# Altium PCB PCB1.PcbDoc
Units mm, origin at the board's own origin, x right, y up, seen from the top; angles counter-clockwise.
Board outline 85.7 x 54 mm, 2 copper layers (Top Layer, Bottom Layer); 67 components, 71 nets, 298 pads, 36 vias.
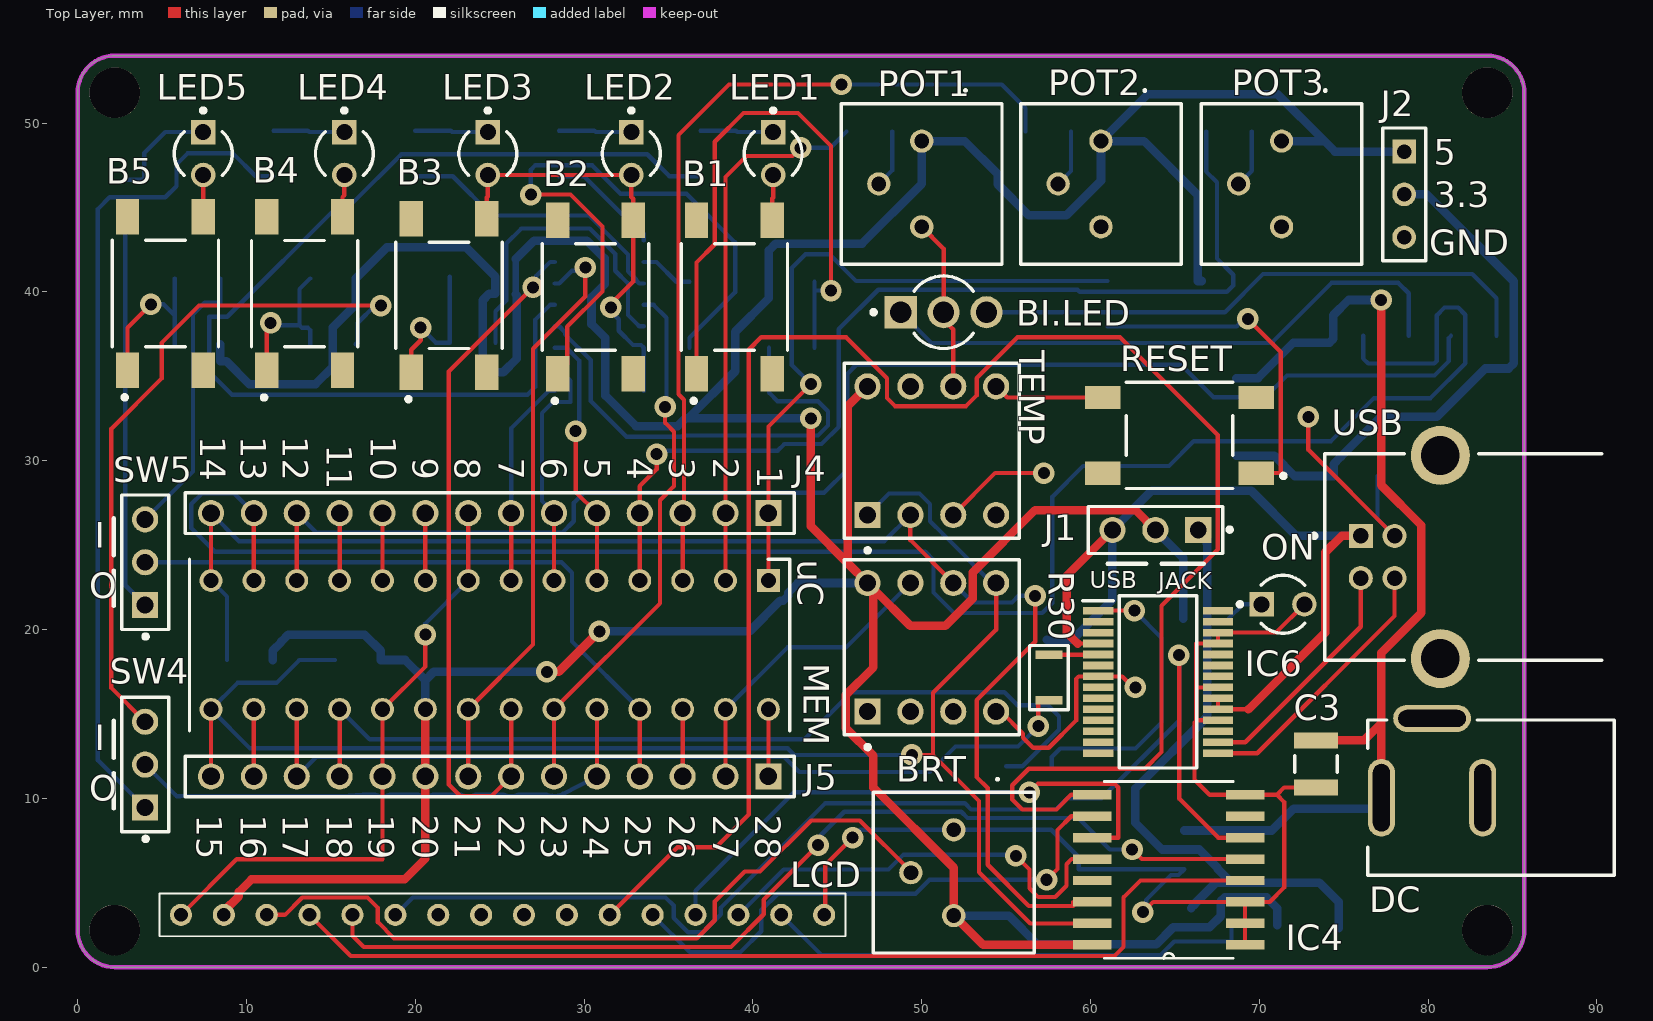
[diagram p0: Top Layer view]
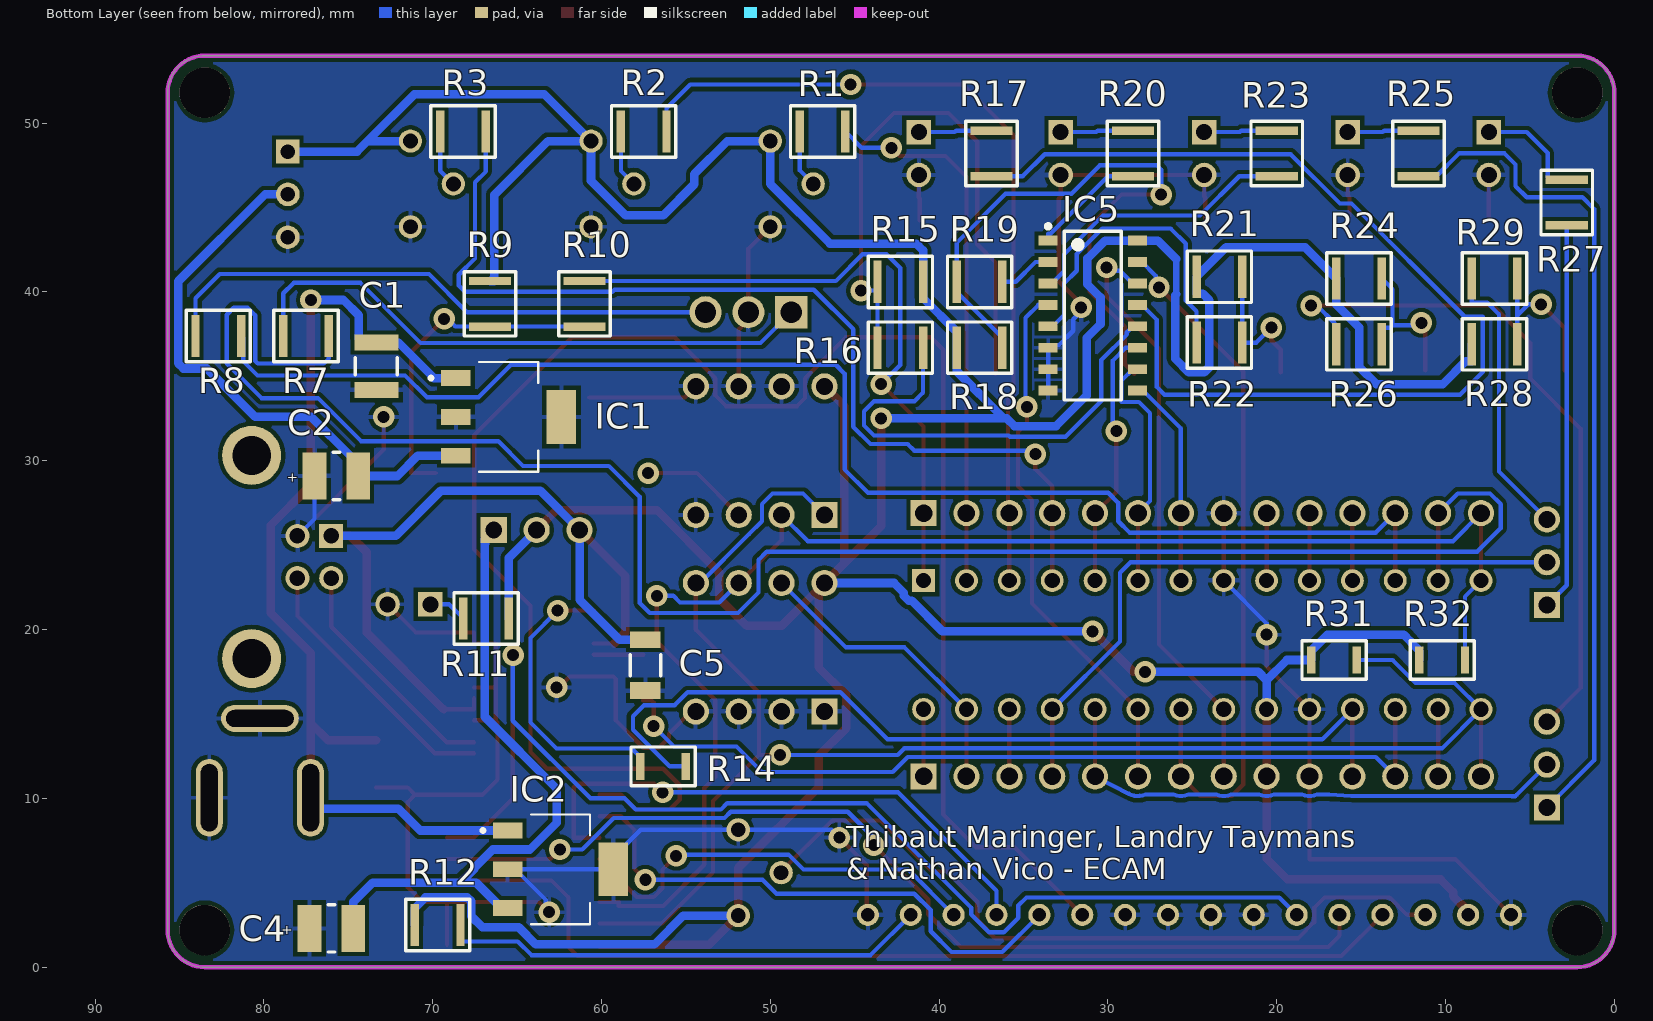
[diagram p1: Bottom Layer view, seen from below]
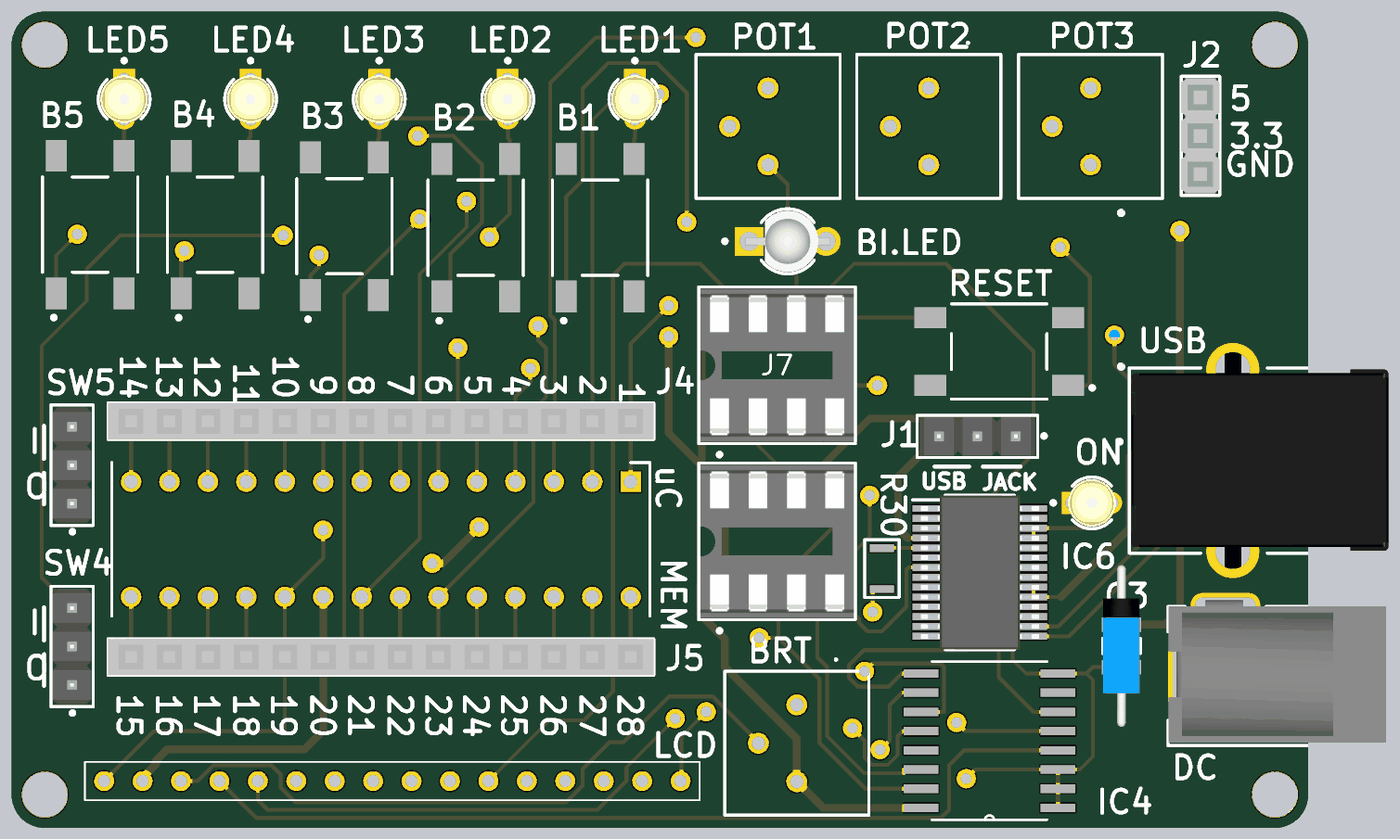
[diagram p2: 3D render of the assembled board from above, using the file's embedded part models]

## Layer stack, top to bottom
Top Solder: solder mask 0.0102, Solder Resist, Dk 3.5
Top Layer: signal copper 0.0356
Dielectric 1: dielectric 0.32, FR-4, Dk 4.8
Bottom Layer: signal copper 0.0356
Bottom Solder: solder mask 0.0102, Solder Resist, Dk 3.5

## Board outline
0,2.2 0,51.8 cw(c2.2,51.8) 2.2,54 83.5,54 cw(c83.5,51.8) 85.7,51.8 85.7,51.807 85.7,2.2 cw(c83.5,2.2) 83.5,0 2.2,0 cw(c2.2,2.2)

## Design rules (kind name [scope] priority, off if disabled: settings)
Clearance [All] p1: gap=0.254 ignorepadtopadclearanceinfootprint=FALSE except(0: Arc-Hole Track-Hole SMDPad-Hole THPad-Hole Via-Hole Fill-Hole Poly-Hole Region-Hole Text-Hole; 0.127: SMDPad-SMDPad)
HoleSize [All] p1: absolutevalues=TRUE maxlimit=5.08 minlimit=0.025 maxpercent=80.000 minpercent=20.000
PolygonConnect [All] p1: connectstyle=Relief reliefconductorwidth=0.254 reliefentries=4 polygonreliefangle="90 Angle" airgapwidth=0.254
RoutingVias [All] p1: holewidth=0.711 width=1.27 viastyle="Through Hole" minholewidth=0.711 minwidth=1.27 maxholewidth=0.711 maxwidth=1.27
SilkToSilkClearance [All] p1: silktosilkclearance=0.025
SilkToSolderMaskClearance [IsPad] p1: minsilkscreentomaskgap=0.025 clearancetoexposedcopper=TRUE
SolderMaskExpansion [All] p1: expansion=0.102 istentingtop=FALSE
Width [All] p1: maxlimit=0.508 minlimit=0.254 preferedwidth=0.254 minimp=50.000000 maximp=50.000000 favimp=50.000000
27 further rules are at their usual default settings.

## Classes and differential pairs
component class UART: C5 IC6 R14 R30 USB
component class Switch: B1 B2 B3 B5 IC5 LED3 LED4 LED5 R15 R16 R17 R18 R19 R20 R21 R22 R23 R24 R25 R26 R27 R28 R29 SW4
component class LCD-MEM-TEMP: IC4 MEM R12 TEMP
component class PIC: J4 J5 ON R9 R10 R11 R31 R32 RESET uC
component class Power: BI.LED C1 C2 C3 C4 DC IC1 IC2 J1 J2 POT1 POT2 POT3 R1 R2 R3 R7 R8

## Components (designator, comment, footprint, x,y, rotation, side; value= is the part's Value field where it differs from the comment)
B1 "SW-PB" BUTTON 38.9,39.7 r90 top (schematic designator S2)
B2 "SW-PB" BUTTON 30.675,39.7 r90 top (schematic designator S3)
B3 "SW-PB" BUTTON 22,39.8 r90 top (schematic designator S4)
B4 "SW-PB" BUTTON 13.449,39.9 r90 top (schematic designator S5)
B5 "SW-PB" BUTTON 5.195,39.907 r90 top (schematic designator S6)
BI.LED "LTL1BEKVJNN" "Bicolor LED" 51.3,38.8 r180 top (schematic designator D1)
BRT "RPot" POT 51.9,5.6 r90 top value=10K (schematic designator R13)
C1 "Cap" "Cap 100nF" 73.339,35.6 r270 bottom value=100nF
C2 "Cap Pol2" "CAP+ 22UF" 75.7,29.1 r0 bottom value=22uF
C3 "Cap" "Cap 100nF" 73.358,12.041 r270 top value=100nF
C4 "Cap Pol2" "CAP+ 22UF" 76,2.3 r0 bottom value=22uF
C5 "Cap" "cap 4.7uf" 57.4,17.9 r90 bottom value=4.7uF
DC "PJ-002A" "DC Jack" 83.732,10.041 r90 top (schematic designator J3)
IC1 "MIC5209-3.3YS-TR" LDO 65.5,32.6 r180 bottom
IC2 "MIC5209-5.0YS" LDO 62.425,5.8 r180 bottom
IC4 "PCF8574AT_3,512" "I2C LCD IC" 64.635,5.771 r180 top
IC5 "MC14053BDG" "Triple SPDT switch" 30.9,38.6 r180 bottom
IC6 "FT232RL-TUBE" SOP65P780X200-28N 64,16.9 r0 top
J1 "M20-9990346" "header 3 pins male" 63.84,25.9 r180 top
J2 "M20-9990346" "Header 3 pins fem." 78.579,48.318 r270 top
J4 "SSW-114-01-G-S" "Header 14 pins fem." 40.92,26.9 r180 top
J5 "SSW-114-01-G-S" "Header 14 pins fem." 40.92,11.3 r180 top
LCD "M20-7821642" "Header 16 pins fem." 44.22,3.1 r0 top (schematic designator J6)
LED1 "LED1" "LED 3mm" 41.2,48.2 r270 top (schematic designator D3)
LED2 "LED1" "LED 3mm" 32.8,48.2 r270 top (schematic designator D4)
LED3 "LED1" "LED 3mm" 24.3,48.2 r270 top (schematic designator D5)
LED4 "LED1" "LED 3mm" 15.8,48.2 r270 top (schematic designator D6)
LED5 "LED1" "LED 3mm" 7.44,48.2 r270 top (schematic designator D7)
MEM "24LC256 MEM" "DIL 8 pins" 50.6,18.95 r0 top (schematic designator J8)
ON "LED1" "LED 3mm" 71.4,21.5 r0 top (schematic designator D2)
POT1 "RPot" POT 50,46.4 r90 top value=10K (schematic designator R4)
POT2 "RPot" POT 60.62,46.4 r90 top value=10K (schematic designator R5)
POT3 "RPot" POT 71.316,46.4 r90 top value=10K (schematic designator R6)
R1 "Res1" "Resistor 1210" 46.9,49.5 r0 bottom value=470
R2 "Res1" "Resistor 1210" 57.5,49.5 r0 bottom value=470
R3 "Res1" "Resistor 1210" 68.2,49.5 r0 bottom value=470
R7 "Res1" "Resistor 1210" 77.5,37.4 r0 bottom value=470
R8 "Res1" "Resistor 1210" 82.7,37.4 r0 bottom value=470
R9 "Res1" "Resistor 1210" 66.6,39.3 r90 bottom value=10k
R10 "Res1" "Resistor 1210" 61,39.3 r270 bottom value=470
R11 "Res1" "Resistor 1210" 66.832,20.649 r0 bottom value=470
R12 "Res1" "Resistor 1210" 69.7,2.5 r180 bottom value=330
R14 "Res1" "Resistor 1206" 56.35,11.9 r0 bottom value=270
R15 "Res1" "Resistor 1210" 42.3,40.6 r180 bottom value=10k
R16 "Res1" "Resistor 1210" 42.3,36.7 r0 bottom value=470
R17 "Res1" "Resistor 1210" 36.9,48.2 r270 bottom value=470
R18 "Res1" "Resistor 1210" 37.6,36.7 r0 bottom value=10k
R19 "Res1" "Resistor 1210" 37.6,40.6 r0 bottom value=470
R20 "Res1" "Resistor 1210" 28.51,48.2 r270 bottom value=470
R21 "Res1" "Resistor 1210" 23.4,40.9 r0 bottom value=10k
R22 "Res1" "Resistor 1210" 23.4,37 r180 bottom value=470
R23 "Res1" "Resistor 1210" 20,48.2 r270 bottom value=470
R24 "Res1" "Resistor 1210" 15.124,40.8 r0 bottom value=10k
R25 "Res1" "Resistor 1210" 11.6,48.2 r270 bottom value=470
R26 "Res1" "Resistor 1210" 15.124,36.9 r180 bottom value=470
R27 "Res1" "Resistor 1210" 2.819,45.3 r270 bottom value=470
R28 "Res1" "Resistor 1210" 7.1,36.9 r0 bottom value=10k
R29 "Res1" "Resistor 1210" 7.1,40.8 r180 bottom value=470
R30 "Res1" "Resistor 1206" 57.527,17.154 r90 top value=270
R31 "Res1" "Resistor 1206" 16.6,18.2 r0 bottom value=4.7k
R32 "Res1" "Resistor 1206" 10.197,18.2 r0 bottom value=4.7k
RESET "SW-PB" BUTTON 65.276,31.51 r180 top (schematic designator S1)
SW4 "M20-9990346" "header 3 pins male" 4,12 r90 top (schematic designator J10)
SW5 "M20-9990346" "header 3 pins male" 4,23.99 r90 top (schematic designator J11)
TEMP "DS1621 TEMP" "DIL 8 pins" 50.6,30.6 r0 top (schematic designator J7)
uC "PIC16F1518-I_SP" DIP28 40.92,22.9 r270 top (schematic designator IC3)
USB "USB-B" "USB B" 82.5,24.3 r90 top (schematic designator J9)

## Footprints (in the part's own frame and the unit in brackets; to place one, negate y for a bottom-side part, rotate by r counter-clockwise, add the part's x,y. Pads: shape width x height; smd on the part's side, far side on the other; paste and mask are expansions set on the pad)
"Bicolor LED" [mm]
  rect 1.9x1.9 hole 1.25 paste-1000 mask+0: 1(2.54,0)
  round 1.9 hole 1.25 paste-1000 mask+0: 2(0,0) 3(-2.54,0)
  silkscreen extent -1.75,-2.15 4.27,2.15, body extent -3.59,-2.25 3.59,2.25, height 0.25
BUTTON [mm]
  rect 2.1x1.38 smd paste+0 mask+0: 1(-4.55,2.24) 2(4.55,-2.24) 3(-4.55,-2.24) 4(4.55,2.24)
  silkscreen extent -6.27,-3.15 3.15,3.15
"cap 4.7uf" [mm]
  rect 1x1.8 smd paste+0 mask+0: 1(-1.5,0) 2(1.5,0)
  silkscreen extent -0.63,-0.9 0.62,0.9, body extent -1.6,-0.8 1.6,0.8, height 1.45
"Cap 100nF" [mm]
  rect 0.95x2.6 smd paste+0 mask+0: 1(-1.4,0) 2(1.4,0)
  silkscreen extent -0.5,-1.25 0.5,1.25, body extent -5.36,-1.2 5.36,1.2, height 2.4
"CAP+ 22UF" [mm]
  rect 1.4x2.8 smd paste+0 mask+0: 1(-1.3,0) 2(1.3,0)
  silkscreen extent -0.2,-1.4 0.2,1.4, body extent -1.75,-1.4 1.75,1.4, height 1.92
"DC Jack" [mm]
  oval 4.6x1.6 hole 1 slot 4 at 0 deg paste-1000 mask+0: 1(0,6.5) 2(0,0.5)
  oval 1.6x4.6 hole 4 slot 1 at 0 deg paste-1000 mask+0: 3(4.7,3.5)
  silkscreen extent -4.6,-7.3 4.6,7.3, body extent -4.7,-7.4 5.6,7.4, height 0.25
"DIL 8 pins" [mm]
  rect 1.55x1.55 hole 1 paste-1000 mask+0: 1(-3.81,-3.81)
  round 1.55 hole 1 paste-1000 mask+0: 2(-1.27,-3.81) 3(1.27,-3.81) 4(3.81,-3.81) 5(3.81,3.81) 6(1.27,3.81) 7(-1.27,3.81) 8(-3.81,3.81)
  silkscreen extent -5.18,-6.03 5.18,5.18, body extent -5.28,-5.28 5.28,5.28, height 0.25
DIP28 [mm]
  rect 1.35x1.35 hole 0.9: 1(0,0)
  round 1.35 hole 0.9: 2(0,-2.54) 3(0,-5.08) 4(0,-7.62) 5(0,-10.16) 6(0,-12.7) 7(0,-15.24) 8(0,-17.78) 9(0,-20.32) 10(0,-22.86) 11(0,-25.4) 12(0,-27.94) 13(0,-30.48) 14(0,-33.02) 15(7.62,-33.02) 16(7.62,-30.48) 17(7.62,-27.94) 18(7.62,-25.4) 19(7.62,-22.86) 20(7.62,-20.32) 21(7.62,-17.78) 22(7.62,-15.24) 23(7.62,-12.7) 24(7.62,-10.16) 25(7.62,-7.62) 26(7.62,-5.08) 27(7.62,-2.54) 28(7.62,0)
  silkscreen extent -1.27,-34.29 8.89,1.27
"Header 3 pins fem." [mm] "Low Profile Socket Strip, 1x3 Pins, Vertical, 2.54mm Pitch, Female"
  rect 1.4x1.4 hole 0.86: 1(0,0)
  round 1.4 hole 0.86: 2(2.54,0) 3(5.08,0)
  silkscreen extent -1.39,-1.27 6.48,1.27, body extent -1.27,-1.27 6.35,1.27, height 4.57
"header 3 pins male" [mm]
  rect 1.55x1.55 hole 1 paste-1000 mask+0: 1(-2.54,0)
  round 1.55 hole 1 paste-1000 mask+0: 2(0,0) 3(2.54,0)
  silkscreen extent -4.52,-1.4 3.98,1.4, body extent -4.09,-1.5 4.09,1.5, height 0.25
"Header 14 pins fem." [mm] "SQ Post Socket, 1x14 Pins, Vertical, 2.54mm Pitch, Female"
  rect 1.55x1.55 hole 1.04: 1(0,0)
  round 1.55 hole 1.04: 2(2.54,0) 3(5.08,0) 4(7.62,0) 5(10.16,0) 6(12.7,0) 7(15.24,0) 8(17.78,0) 9(20.32,0) 10(22.86,0) 11(25.4,0) 12(27.94,0) 13(30.48,0) 14(33.02,0)
  silkscreen extent -1.53,-1.21 34.55,1.2, body extent -1.52,-1.21 34.54,1.21, height 8.51
"Header 16 pins fem." [mm]
  round 1.31 hole 0.81: 1(0,0) 2(-2.54,0) 3(-5.08,0) 4(-7.62,0) 5(-10.16,0) 6(-12.7,0) 7(-15.24,0) 8(-17.78,0) 9(-20.32,0) 10(-22.86,0) 11(-25.4,0) 12(-27.94,0) 13(-30.48,0) 14(-33.02,0) 15(-35.56,0) 16(-38.1,0)
  silkscreen extent -39.37,-1.27 1.27,1.27
"I2C LCD IC" [mil]
  rect 90x22 smd: 1(-178,175) 2(-178,125) 3(-178,75) 4(-178,25) 5(-178,-25) 6(-178,-75) 7(-178,-125) 8(-178,-175) 9(178,-175) 10(178,-125) 11(178,-75) 12(178,-25) 13(178,25) 14(178,75) 15(178,125) 16(178,175)
  silkscreen extent -150,-206 150,207
LDO [mm]
  rect 1.76x0.94 smd: 1(-3.125,2.3) 2(-3.125,0) 3(-3.125,-2.3)
  rect 1.76x3.19 smd: 4(3.125,0)
  silkscreen extent -4.7,-3.25 1.75,3.25
"LED 3mm" [mm]
  rect 1.45x1.45 hole 0.95 paste-1000 mask+0: 1(-1.27,0)
  round 1.45 hole 0.95 paste-1000 mask+0: 2(1.27,0)
  silkscreen extent -2.67,-1.71 1.3,1.71, body extent -2.22,-2.22 2.22,2.22, height 0.25
POT [mm]
  round 1.38 hole 0.88: 1(2.54,0) 2(-2.54,0) 3(0,2.54)
  silkscreen extent -4.76,-4.76 5.57,4.76
"Resistor 1206" [mm]
  rect 0.5x1.6 smd: 1(-1.35,0) 2(1.35,0)
  silkscreen extent -1.9,-1.14 1.91,1.14
"Resistor 1210" [mm]
  rect 0.5x2.5 smd: 1(-1.35,0) 2(1.35,0)
  silkscreen extent -1.91,-1.52 1.9,1.52
SOP65P780X200-28N [mm]
  rect 1.8x0.45 smd: 1(-3.55,4.225) 2(-3.55,3.575) 3(-3.55,2.925) 4(-3.55,2.275) 5(-3.55,1.625) 6(-3.55,0.975) 7(-3.55,0.325) 8(-3.55,-0.325) 9(-3.55,-0.975) 10(-3.55,-1.625) 11(-3.55,-2.275) 12(-3.55,-2.925) 13(-3.55,-3.575) 14(-3.55,-4.225) 15(3.55,-4.225) 16(3.55,-3.575) 17(3.55,-2.925) 18(3.55,-2.275) 19(3.55,-1.625) 20(3.55,-0.975) 21(3.55,-0.325) 22(3.55,0.325) 23(3.55,0.975) 24(3.55,1.625) 25(3.55,2.275) 26(3.55,2.925) 27(3.55,3.575) 28(3.55,4.225)
  silkscreen extent -4.45,-5.1 2.3,5.1, body extent -3.9,-5.1 3.9,5.1, height 2
"Triple SPDT switch" [mm] "SOIC, 16-Leads, Body 10x4mm, Pitch 1.27mm"
  rect 1.12x0.58 smd: 1(-2.64,4.445) 2(-2.64,3.175) 3(-2.64,1.905) 4(-2.64,0.635) 5(-2.64,-0.635) 6(-2.64,-1.905) 7(-2.64,-3.175) 8(-2.64,-4.445) 9(2.64,-4.445) 10(2.64,-3.175) 11(2.64,-1.905) 12(2.64,-0.635) 13(2.64,0.635) 14(2.64,1.905) 15(2.64,3.175) 16(2.64,4.445)
  silkscreen extent -2.77,-5 1.68,5.41, body extent -2,-5 2,5, height 1.75
"USB B" [mm]
  rect 1.42x1.42 hole 0.92 paste-1000 mask+0: 1(1.25,6.49)
  round 1.42 hole 0.92 paste-1000 mask+0: 2(-1.25,6.49) 3(-1.25,4.49) 4(1.25,4.49)
  round 3.5 hole 2.3 paste-1000 mask+0: 5(-6.02,1.78) 6(6.02,1.78)
  silkscreen extent -6.12,-7.8 6.12,9.37, body extent -7.87,-8.72 7.87,8.72, height 0.25

## Part data
B1 B2 B3 B4 B5 RESET: "Switch", LatestRevisionDate=17-Jul-2002, LatestRevisionNote="Re-released for DXP Platform.", PackageDescription="Switch; 2 Leads", PackageReference=SPST-2, Published=24-Mar-1999, Publisher="Altium Limited"
BRT POT1 POT2 POT3: "Potentiometer", LatestRevisionDate=17-Jul-2002, LatestRevisionNote="Re-released for DXP Platform.", PackageDescription="Variable Resistor, Thru-Hole; 3 Leads", PackageReference=VR5, Published=8-Jun-2000, Publisher="Altium Limited", Set Position=0.5, Sim Note="Enter the Resistance value and the set point into parameter fields."
C1 C3 C5: "Capacitor", LatestRevisionDate=17-Jul-2002, LatestRevisionNote="Re-released for DXP Platform.", PackageDescription="Radial Cap, Thru-Hole; 2 Leads; 0.3 in Pin Spacing", PackageReference=RAD-0.3, Published=8-Jun-2000, Publisher="Altium Limited"
C2 C4: "Polarized Capacitor (Axial)", LatestRevisionDate=17-Jul-2002, LatestRevisionNote="Re-released for DXP Platform.", PackageDescription="Polarized Capacitor; 2 Leads", PackageReference=POLAR0.8, Published=8-Jun-2000, Publisher="Altium Limited"
DC: "DC jack", Package=None, Availability=Unavailable, CUI_purchase_URL=https://www.cuidevices.com/product/interconnect/connectors/dc-power-connectors/jacks/pj-002a?utm_source=snapeda.com&utm_medium=referral&utm_campaign=snapedaBOM, MF="CUI Devices", MP=PJ-002A, Price=None, SnapEDA_Link=https://www.snapeda.com/parts/PJ-002A/CUI%20Devices/view-part/287588/?ref=snap
IC1: "Integrated Circuit", Manufacturer_Name=Microchip, Mouser Part Number=998-MIC5209-3.3YSTR, Arrow Part Number=MIC5209-3.3YS-TR, Arrow Price/Stock=https://www.arrow.com/en/products/mic5209-3.3ys-tr/microchip-technology, Datasheet Link=http://ww1.microchip.com/downloads/en/DeviceDoc/mic5209.pdf, Height=1.7mm, Manufacturer_Part_Number=MIC5209-3.3YS-TR, Mouser Price/Stock=https://www.mouser.co.uk/ProductDetail/Microchip-Technology-Micrel/MIC5209-33YS-TR?qs=U6T8BxXiZAXms9mvoyYO%2FQ%3D%3D
IC2: "Integrated Circuit", Manufacturer_Name=Microchip, Mouser Part Number=998-MIC5209-5.0YS, Arrow Part Number=MIC5209-5.0YS, Arrow Price/Stock=https://www.arrow.com/en/products/mic5209-5.0ys/microchip-technology, Datasheet Link=http://www.micrel.com/_PDF/mic5209.pdf, Height=1.8mm, Manufacturer_Part_Number=MIC5209-5.0YS, Mouser Price/Stock=https://www.mouser.com/Search/Refine.aspx?Keyword=998-MIC5209-5.0YS
IC4: "Integrated Circuit", Arrow Part Number=PCF8574AT/3,512, Manufacturer_Name=Nexperia, Mouser Part Number=771-PCF85AT3512, Arrow Price/Stock=https://www.arrow.com/en/products/pcf8574at3512/nxp-semiconductors, Datasheet Link=https://www.nxp.com/docs/en/data-sheet/PCF8574_PCF8574A.pdf, Height=2.65mm, Manufacturer_Part_Number=PCF8574AT/3,512, Mouser Price/Stock=https://www.mouser.com/Search/Refine.aspx?Keyword=771-PCF85AT3512
IC5: "Integrated Circuit", Manufacturer_Name="ON Semiconductor", Mouser Part Number=863-MC14053BDG, Arrow Part Number=MC14053BDG, Arrow Price/Stock=https://www.arrow.com/en/products/mc14053bdg/on-semiconductor, Datasheet Link=http://www.onsemi.com/pub/Collateral/MC14051B-D.PDF, Height=1.75mm, Manufacturer_Part_Number=MC14053BDG, Mouser Price/Stock=https://www.mouser.co.uk/ProductDetail/ON-Semiconductor/MC14053BDG?qs=g2rIOKKlpobK7Wa1TqI4Yg%3D%3D
IC6: "Integrated Circuit", Manufacturer_Name="FTDI Chip", Mouser Part Number=895-FT232RL-TUBE, Arrow Part Number=FT232RL-TUBE, Arrow Price/Stock=https://www.arrow.com/en/products/ft232rl-tube/ftdi-chip, Datasheet Link=http://www.ftdichip.com/Support/Documents/DataSheets/ICs/DS_FT232R.pdf, Height=2mm, Manufacturer_Part_Number=FT232RL-TUBE, Mouser Price/Stock=https://www.mouser.co.uk/ProductDetail/FTDI/FT232RL-TUBE?qs=D1%2FPMqvA100UF95YMvGN8w%3D%3D
J1 J2 SW4 SW5: "Connector", Manufacturer_Name=Harwin, Mouser Part Number=855-M20-9990346, Datasheet Link=http://uk.rs-online.com/web/p/products/7457068, Height=8.64mm, Manufacturer_Part_Number=M20-9990346, Mouser Price/Stock=https://www.mouser.co.uk/ProductDetail/Harwin/M20-9990346?qs=ulE8k0yEMYbyhQ3uXpFs8Q%3D%3D
J4 J5: "Connector", Manufacturer_Name=SAMTEC, Mouser Part Number=200-SSW11401GS, Arrow Part Number=SSW-114-01-G-S, Arrow Price/Stock=https://www.arrow.com/en/products/ssw-114-01-g-s/samtec, Datasheet Link=https://eu.mouser.com/datasheet/2/527/ssw_th-1507658.pdf, Height=8.51mm, Manufacturer_Part_Number=SSW-114-01-G-S, Mouser Price/Stock=https://www.mouser.co.uk/ProductDetail/Samtec/SSW-114-01-G-S?qs=FESYatJ8odJdl4aGY%2FwgtQ%3D%3D
LCD: "Connector", Manufacturer_Name=Harwin, Mouser2 Part Number=855-M20-7821642, Datasheet Link=https://componentsearchengine.com//M20-7821642.pdf, Height=8.65mm, Manufacturer_Part_Number=M20-7821642, Mouser2 Price/Stock=https://www.mouser.com/Search/Refine.aspx?Keyword=855-M20-7821642
LED1 LED2 LED3 LED4 LED5 ON: "Typical RED GaAs LED", LatestRevisionDate=08-Jul-2005, LatestRevisionNote="Mech Layer 1 removed.", PackageDescription="LED; 2 Leads", PackageReference=LED-1, Published=8-Jun-2000, Publisher="Altium Limited"
MEM TEMP: library part 110-41-308-41-001000, "Connector", Manufacturer_Name=Mill-Max, Datasheet Link=https://www.arrow.com/en/products/110-41-308-41-001000/mill-max, Height=4.19mm, Manufacturer_Part_Number=110-41-308-41-001000
R1 R2 R3 R7 R8 R9 R10 R11 R12 R14 R15 R16 R17 R18 R19 R20 R21 R22 R23 R24 R25 R26 R27 R28 R29 R30 R31 R32: "Resistor", LatestRevisionDate=17-Jul-2002, LatestRevisionNote="Re-released for DXP Platform.", PackageDescription="Axial Device, Thru-Hole; 2 Leads; 0.3 in Pin Spacing", PackageReference=AXIAL-0.3, Published=8-Jun-2000, Publisher="Altium Limited"
uC: "Integrated Circuit", Arrow Part Number=PIC16F1518-I/SP, Manufacturer_Name=Microchip, Mouser Part Number=579-PIC16F1518-I/SP, Arrow Price/Stock=https://www.arrow.com/en/products/pic16f1518-isp/microchip-technology, Datasheet Link=http://ww1.microchip.com/downloads/en/DeviceDoc/40001452F.pdf, Height=5.08mm, Manufacturer_Part_Number=PIC16F1518-I/SP, Mouser Price/Stock=https://www.mouser.com/Search/Refine.aspx?Keyword=579-PIC16F1518-I%2FSP
USB: library part USBR-B-S-S-O-TH, "Connector", Manufacturer_Name=SAMTEC, Mouser Part Number=200-USBRBSSOTH, Arrow Part Number=USBR-B-S-S-O-TH, Arrow Price/Stock=https://www.arrow.com/en/products/usbr-b-s-s-o-th/samtec, Datasheet Link=https://componentsearchengine.com/Datasheets/2/USBR-B-S-S-O-TH.pdf, Height=11mm, Manufacturer_Part_Number=USBR-B-S-S-O-TH, Mouser Price/Stock=https://www.mouser.co.uk/ProductDetail/Samtec/USBR-B-S-S-O-TH?qs=Sk19l0%2FxcWm4mdmoDSlrBQ%3D%3D

## Free pads (board coordinates)
  round 3 hole 3: 1(2.2,2.2) 1(2.2,51.8) 1(83.5,2.2) 1(83.5,51.8)

## Via types
v1: diameter 1.27, hole 0.711, Top Layer to Bottom Layer, 36 vias

## Nets (pads, with @x,y where several pads share a name; then routed paths per layer and width w, separated by ;. In a path a pad name is that pad's centre, name@x,y a point inside that pad or via, vN(x,y) a via of type N, cw(c..) or ccw(c..) an arc to the next point about the centre after c; other vN are vias at no path point)
+3.3: C2.1 IC1.3 J2.2 | length 33.6
  Bottom Layer w0.508: IC1.3 70.891,30.3 72.091,29.1 C2.1 74.4,29.8 74.846,30.246 77.196,32.596 80.511,32.596 83.383,35.468 84.767,35.468 85.065,35.766 85.065,40.64 79.927,45.778 J2.2
+5: BRT.2 IC4.16 IC5.16 J1.2 J2.1 J5.9 LCD.15 MEM.8 POT1.1 POT2.1 POT3.1 R9.2 R11.1 R12.1 R15.2 R18.2 R21.2 R24.2 R28.2 R31.2 R32.2 TEMP.8 uC.20 | length 312.2
  Top Layer w0.508: LCD.15 8.66,3.313 9.556,4.208 9.556,4.458 10.298,5.2 19.366,5.2 20.6,6.434 J5.9 uC.20 ; v1(27.8,17.5) 28.5,17.5 v1(30.9,19.9) ; v1(43.434,32.512) 43.434,26.116 45.618,23.932 ; TEMP.8 45.618,33.238 45.618,23.932 ; IC4.16 53.634,1.326 BRT.2 51.9,5.887 47.14,10.647 47.14,12.522 45.507,14.155 45.507,16.125 47.14,17.758 MEM.8@47.14,22.41 ; J1.2 62.664,27.076 56.718,27.076 53.026,23.384 53.026,21.844 51.405,20.223 49.327,20.223 MEM.8@47.14,22.41 ; 45.618,23.932 MEM.8 MEM.8@47.14,22.41
  Bottom Layer w0.381: 25.959,39.854 25.959,41.953
  Bottom Layer w0.508: R28.2 8.45,35.89 8.814,35.89 10.16,34.544 14.097,34.544 15.113,35.56 15.113,37.897 16.474,39.258 R24.2 18.321,42.647 23.003,42.647 R21.2 24.746,40.896 24.746,39.903 24.384,39.903 23.992,39.511 23.992,35.54 24.29,35.242 25.21,35.242 26.02,36.052 26.02,39.793 25.959,39.854 ; R32.2 11.547,18.75 12.068,19.271 12.068,19.302 12.466,19.7 17,19.7 17.95,18.75 R31.2 19.4,18.2 20.6,17 ; uC.20 20.6,17 ; 25.959,41.953 27.051,43.045 IC5.16 30.162,43.045 31.217,41.99 31.217,40.45 30.44,39.673 30.44,38.1 31.265,37.275 31.265,33.861 33.069,32.057 35.539,32.057 35.994,32.512 36.156,32.512 ; v1(27.8,17.5) 21.1,17.5 20.6,17 ; v1(30.9,19.9) 39.809,19.9 41.626,21.717 41.805,21.717 42.103,22.015 42.103,22.194 42.669,22.76 MEM.8 ; v1(43.434,32.512) 36.156,32.512 ; BRT.2 55.157,3.06 56.865,1.352 63.888,1.352 64.898,2.362 67.056,2.362 67.716,3.023 67.716,3.905 67.942,4.131 70.424,4.131 71.05,3.505 R12.1 ; J1.2 65.482,24.258 R11.1 ; R9.2 66.35,40.65 66.346,40.654 66.346,45.754 63.16,48.94 POT2.1 ; POT3.1 73.856,48.94 ; J2.1 74.478,48.318 73.856,48.94 ; 36.156,32.512 38.95,35.306 R18.2 38.95,37.643 40.95,39.643 R15.2 40.95,42.464 41.352,42.866 46.466,42.866 50,46.4 POT1.1 52.54,48.94 54.5,46.98 54.5,46.375 56.342,44.533 58.566,44.533 60.62,46.587 POT2.1 ; POT2.1 63.38,51.7 71.096,51.7 73.856,48.94
+5-Jack: C4.1 IC2.3 J1.1 | length 37.9
  Bottom Layer w0.508: IC2.3@65.96,3.5 66.176,3.716 66.176,3.765 67.416,5.005 68.35,5.005 ; J1.1 66.901,25.379 66.901,25.09 66.909,25.081 66.909,14.839 62.662,10.592 62.662,8.55 64.238,6.974 66.444,6.974 67.495,5.923 67.495,5.86 68.35,5.005 ; C4.1 74.7,3.862 73.557,5.005 68.35,5.005
+5-USB: C5.2 IC6.4 IC6.19 IC6.20 J1.3 USB.1 | length 51.3
  Top Layer w0.254: 59.237,19.175 IC6.4 ; IC6.20 IC6.19 69.352,15.275
  Top Layer w0.508: 59.237,19.175 58.6,19.812 58.6,23.2 J1.3 ; 69.352,15.275 73.903,19.826 73.903,24.576 74.877,25.55 USB.1
  Bottom Layer w0.508: C5.2 58.928,19.4 61.3,21.772 J1.3 63.619,28.219 69.52,28.219 72.189,25.55 USB.1
"DC POWER": C1.1 C3.1 DC.1 IC1.1 IC2.1 | length 59.6
  Top Layer w0.508: C3.1 76.2,13.441 77.232,14.473 ; v1(77.216,39.522) 77.216,28.55 79.601,26.164 79.601,21.003 77.232,18.634 77.232,14.473 ; DC.1 77.232,14.473
  Bottom Layer w0.508: IC2.1 70.739,8.1 72.039,9.4 76.727,9.4 77.232,9.904 DC.1 ; IC1.1 69.926,34.9 72.026,37 C1.1 74.164,37 74.385,37.221 74.385,38.617 75.29,39.522 v1(77.216,39.522)
GND: B1.2 B2.2 B3.2 B4.2 B5.2 BI.LED.2 BRT.1 C1.2 C2.2 C3.2 C4.2 C5.1 DC.2 DC.3 IC1.2 IC1.4 IC2.2 IC2.4 IC4.1 IC4.2 IC4.3 IC4.8 IC5.6 IC5.7 IC5.8 IC6.7 IC6.18 IC6.21 IC6.25 IC6.26 J2.3 J4.8 J5.10 LCD.1 LCD.7 LCD.8 LCD.9 LCD.10 LCD.16 LED1.2 LED2.2 LED3.2 LED4.2 LED5.2 MEM.1 MEM.2 MEM.3 MEM.4 ON.2 POT1.2 POT2.2 POT3.2 RESET.2 TEMP.4 TEMP.5 TEMP.6 TEMP.7 uC.8 uC.19 USB.4 | length 185.6
  Top Layer w0.254: LCD.16 9.42,6.4 18.06,6.4 J5.10 uC.19 20.6,17.82 v1(20.6,19.7) ; B5.2 7.435,45.669 7.44,45.674 LED5.2 ; B4.2 15.689,45.618 15.8,45.729 LED4.2 ; uC.8 J4.8 ; B3.2 24.24,45.593 24.3,45.653 LED3.2 LED2.2 32.8,45.632 32.915,45.517 B2.2 32.915,40.615 31.583,39.283 v1(31.583,39.088) ; B1.2 41.14,45.542 41.2,45.602 LED1.2 ; LCD.1 44.284,3.163 44.284,6.05 v1(45.914,7.68) ; POT1.2 51.3,42.56 BI.LED.2 51.3,38.355 51.87,37.785 TEMP.6 ; TEMP.5 55.07,33.75 RESET.2 ; MEM.4@54.425,15.125 MEM.4 54.692,15.14 56.005,13.827 56.005,13.595 56.6,13 57.525,13 59.147,14.621 ; 59.15,14.625 59.147,14.621 ; v1(62.662,16.575) 62.525,16.575 61.875,17.225 IC6.7 59.295,17.225 59.147,17.076 59.147,14.621 ; v1(63.099,3.257) 63.708,3.866 IC4.3 ; IC6.18 66.325,14.625 ; IC6.21 66.269,16.575 ; IC4.1 IC4.2 IC4.3 ; ON.2 70.995,19.825 IC6.26 IC6.25 66.269,19.175 66.269,16.575 ; v1(72.9,32.6) 72.9,30.66 USB.4 ; C3.2 71.469,10.641 71.044,10.216 ; 66.269,16.575 66.269,14.681 66.325,14.625 ; 66.325,14.625 66.294,14.625 66.162,14.493 66.162,11.11 67.056,10.216 IC4.8 71.044,10.216 ; IC4.3 70.612,3.866 71.469,4.723 71.469,9.791 71.044,10.216
  Bottom Layer w0.254: v1(20.6,19.7) 20.6,20.36 uC.8 ; v1(31.583,39.088) 31.583,38.99 31.518,38.925 32.056,38.387 32.056,37.706 32.904,36.858 33.377,36.858 IC5.6 IC5.7 IC5.8 ; v1(45.914,7.68) 46.374,8.14 BRT.1 57.675,8.14 59.3,6.515 IC2.4 IC2.2 65.207,5.457 64.763,5.457 63.293,3.988 63.293,3.451 v1(63.099,3.257) ; C2.2 77,26.56 USB.4
NetD1_1: BI.LED.1 R7.2 | length 35.1
  Bottom Layer w0.254: BI.LED.1 50.578,36.982 70.714,36.982 74.27,40.538 78.232,40.538 78.85,39.92 R7.2
NetD1_3: BI.LED.3 R8.2 | length 34
  Bottom Layer w0.254: BI.LED.3 67.957,38.8 70.22,41.063 82.611,41.063 84.05,39.624 R8.2
NetD2_1: ON.1 R11.2 | length 2.3
  Bottom Layer w0.254: R11.2 69.033,21.5 ON.1
NetD3_1: LED1.1 R17.1 | length 4.3
  Bottom Layer w0.254: R17.1 38.989,49.55 39.069,49.47 LED1.1
NetD4_1: LED2.1 R20.1 | length 4.3
  Bottom Layer w0.254: R20.1 30.607,49.55 30.687,49.47 LED2.1
NetD5_1: LED3.1 R23.1 | length 4.3
  Bottom Layer w0.254: R23.1 22.098,49.55 22.178,49.47 LED3.1
NetD6_1: LED4.1 R25.1 | length 4.2
  Bottom Layer w0.254: R25.1 13.64,49.55 13.72,49.47 LED4.1
NetD7_1: LED5.1 R27.1 | length 6.6
  Bottom Layer w0.254: R27.1 3.819,46.65 3.942,46.773 3.942,48.227 5.185,49.47 LED5.1
NetIC3_1: J4.1 R10.1 uC.1 | length 39.7
  Top Layer w0.254: uC.1 J4.1 40.92,32.03 v1(43.434,34.544)
  Bottom Layer w0.254: v1(43.434,34.544) 42.3,35.678 42.3,41.415 43.116,42.231 44.535,42.231 46.116,40.65 R10.1
NetIC3_2: J4.2 R1.1 uC.2 | length 32.2
  Top Layer w0.254: uC.2 J4.2 38.38,46.813 39.624,48.057 42.342,48.057 v1(42.824,48.539)
  Bottom Layer w0.254: v1(42.824,48.539) 44.589,48.539 R1.1
NetIC3_3: J4.3 R2.1 uC.3 | length 50.3
  Top Layer w0.254: uC.3 J4.3 35.916,26.976 35.916,33.615 35.589,33.942 35.589,49.289 38.588,52.288 v1(45.24,52.288)
  Bottom Layer w0.254: v1(45.24,52.288) 54.747,52.288 56.15,50.886 R2.1
NetIC3_4: J4.4 R3.1 uC.4 | length 59.5
  Top Layer w0.254: uC.4 J4.4 33.3,28.499 34.3,29.499 v1(34.3,30.4)
  Bottom Layer w0.254: v1(34.3,30.4) 34.5,30.6 41.478,30.6 41.866,30.988 44.065,30.988 45.087,32.01 45.087,37.797 47.422,40.132 59.233,40.132 59.36,40.005 68.072,40.005 68.45,40.383 68.45,41.024 67.488,41.986 67.488,46.504 66.85,47.142 R3.1
NetIC3_5: IC5.11 J4.5 uC.5 | length 15.4
  Top Layer w0.254: v1(29.5,31.76) 29.5,28.16 J4.5 uC.5
  Bottom Layer w0.254: IC5.11 28.956,36.695 29.709,35.942 29.709,31.969 v1(29.5,31.76)
NetIC3_6: IC5.10 J4.6 uC.6 | length 14.7
  Top Layer w0.254: uC.6 J4.6
  Bottom Layer w0.254: J4.6 27.508,27.612 27.508,32.824 28.169,33.484 29.201,33.484 29.201,34.748 28.524,35.425 IC5.10
NetIC3_7: IC5.9 J4.7 uC.7 | length 12.5
  Top Layer w0.254: uC.7 J4.7
  Bottom Layer w0.254: J4.7 25.68,31.92 27.915,34.155 IC5.9
NetIC3_9: J4.9 uC.9 | length 4
  Top Layer w0.254: uC.9 J4.9
NetIC3_10: J4.10 uC.10 | length 4
  Top Layer w0.254: uC.10 J4.10
NetIC3_11: J4.11 uC.11 | length 4
  Top Layer w0.254: uC.11 J4.11
NetIC3_12: J4.12 R8.1 uC.12 | length 84
  Top Layer w0.254: uC.12 J4.12
  Bottom Layer w0.254: J4.12 14.136,25.744 28.716,25.744 29.388,26.416 29.388,27.508 29.985,28.105 44.209,28.105 45.595,29.492 45.595,35.156 46.126,35.687 65.354,35.687 67.28,33.761 70.342,33.761 71.636,35.056 80.373,35.056 81.227,35.909 81.227,37.277 R8.1
NetIC3_13: J4.13 R7.1 uC.13 | length 111.9
  Top Layer w0.254: uC.13 J4.13
  Bottom Layer w0.254: J4.13 9.273,28.067 7.366,28.067 6.731,27.432 6.731,26.01 8.128,24.613 50.216,24.613 50.698,24.13 50.698,22.2 51.914,20.984 57.139,20.984 57.734,21.579 57.734,27.864 59.563,29.693 64.643,29.693 66.114,31.164 74.245,31.164 76.791,33.71 80.138,33.71 82.2,35.771 82.2,38.653 81.779,39.074 80.972,39.074 80.511,38.613 80.511,35.912 80.362,35.763 76.454,35.763 76.15,36.067 R7.1
NetIC3_14: IC4.14 J4.14 MEM.6 R32.1 TEMP.2 uC.14 | length 87.5
  Top Layer w0.254: uC.14 J4.14 ; TEMP.2 49.33,25.3 MEM.6 ; v1(56.718,22) 56.718,19.284 53.254,15.82 53.254,11.27 53.908,10.616 53.908,6.066 56.342,3.632 58.979,3.632 58.979,3.866 IC4.14
  Bottom Layer w0.254: uC.14 8.847,21.953 R32.1 ; J4.14 9.564,25.236 47.776,25.236 TEMP.2 ; MEM.6 53.026,21.604 55.347,21.604 55.743,22 v1(56.718,22)
NetIC3_15: IC4.15 J5.14 MEM.5 R31.1 TEMP.1 uC.15 | length 95.2
  Top Layer w0.254: J5.14 uC.15 ; v1(49.419,12.576) 50.67,12.576 50.676,12.57 ; MEM.5 54.41,19.992 50.676,16.258 50.676,12.57 ; IC4.15 56.428,2.596 53.4,5.624 53.4,9.846 50.676,12.57
  Bottom Layer w0.254: R31.1 13.136,18.2 11.781,16.845 9.465,16.845 uC.15 10.216,12.964 42.063,12.964 42.451,12.576 v1(49.419,12.576) ; TEMP.1 48.057,28.057 49.87,28.057 50.495,27.432 50.495,26.416 51.283,25.629 54.151,22.76 MEM.5
NetIC3_16: J5.13 uC.16 | length 4
  Top Layer w0.254: J5.13 uC.16
NetIC3_17: J5.12 R30.1 uC.17 | length 52
  Top Layer w0.254: J5.12 uC.17 ; v1(56.912,14.285) 56.912,15.681 57.035,15.804 R30.1
  Bottom Layer w0.254: J5.12 14.136,12.456 41.853,12.456 42.749,11.56 50.484,11.56 52.005,13.081 55.707,13.081 v1(56.912,14.285)
NetIC3_18: J5.11 R14.1 uC.18 | length 53.9
  Top Layer w0.254: J5.11 uC.18
  Bottom Layer w0.254: uC.18 17.298,13.502 43.063,13.502 45.857,16.296 54.889,16.296 55.666,15.519 57.486,15.519 58.134,14.871 58.134,14.071 55.963,11.9 R14.1
NetIC3_21: IC5.14 J5.8 uC.21 | length 35.2
  Top Layer w0.254: J5.8 uC.21 26.975,19.115 26.975,36.635 30.074,39.734 v1(30.074,41.45)
  Bottom Layer w0.254: IC5.14 28.53,40.505 29.28,41.255 29.879,41.255 v1(30.074,41.45)
NetIC3_22: IC5.15 J5.7 uC.22 | length 42.1
  Top Layer w0.254: uC.22 J5.7 24.524,10.144 22.661,10.144 21.984,10.821 21.984,35.284 v1(26.975,40.275)
  Bottom Layer w0.254: v1(26.975,40.275) 27.169,40.469 27.169,40.954 27.99,41.775 IC5.15
NetIC3_23: IC5.4 J5.6 uC.23 | length 32.3
  Top Layer w0.254: J5.6 uC.23 34.493,21.553 34.493,27.66 35.332,28.499 35.332,31.724 34.882,32.174 34.8,32.256 v1(34.8,33.2)
  Bottom Layer w0.254: IC5.4 34.12,39.235 34.882,38.474 34.882,33.302 34.995,33.188 34.983,33.2 v1(34.8,33.2)
NetIC3_24: J5.5 SW4.2 uC.24 | length 31.9
  Top Layer w0.254: J5.5 uC.24
  Bottom Layer w0.254: SW4.2 5.791,10.209 5.865,10.135 6.076,10.135 15.521,10.144 ccw(c15.52,11.3) 15.592,10.146 16.89,10.227 17.63,10.227 ccw(c18.06,11.3) 18.49,10.227 20.17,10.227 ccw(c20.6,11.3) 21.03,10.227 22.71,10.227 ccw(c23.14,11.3) 23.57,10.227 25.25,10.227 ccw(c25.68,11.3) 26.11,10.227 27.79,10.227 ccw(c28.22,11.3) 28.746,10.271 J5.5
NetIC3_25: J5.4 SW5.2 uC.25 | length 39.3
  Top Layer w0.254: J5.4 uC.25
  Bottom Layer w0.254: SW5.2 28.664,23.99 29.286,23.368 29.286,19.294 uC.25
NetIC3_26: J5.3 uC.26 | length 4
  Top Layer w0.254: J5.3 uC.26
NetIC3_27: J5.2 MEM.7 uC.27 | length 18
  Top Layer w0.254: J5.2 uC.27
  Bottom Layer w0.254: uC.27 42.048,18.948 45.518,18.948 MEM.7
NetIC3_28: J5.1 uC.28 | length 4
  Top Layer w0.254: J5.1 uC.28
NetIC4_4: IC4.4 LCD.13 | length 60
  Top Layer w0.254: LCD.13 16.174,0.666 61.415,0.666 61.956,1.207 61.956,4.137 62.955,5.136 IC4.4
NetIC4_5: IC4.5 LCD.12 | length 59.6
  Top Layer w0.254: LCD.12 16.28,1.869 16.949,1.2 38.705,1.2 40.644,3.139 40.644,4.006 v1(43.87,7.232) ; v1(62.465,6.974) 63.033,6.406 IC4.5
  Bottom Layer w0.254: v1(43.87,7.232) 43.87,7.671 45.41,9.211 52.344,9.211 52.719,8.836 59.278,8.836 61.14,6.974 v1(62.465,6.974)
NetIC4_6: IC4.6 LCD.11 | length 71.1
  Top Layer w0.254: v1(65.237,18.491) 65.253,18.476 65.253,9.987 67.564,7.676 IC4.6
  Bottom Layer w0.254: LCD.11 19.856,4.136 34.827,4.136 35.311,3.651 35.311,2.924 36.171,2.064 37.029,2.064 38.104,3.139 38.104,3.529 44.294,9.719 52.554,9.719 52.929,9.344 57.974,9.344 58.638,10.008 60.655,10.008 65.253,14.605 65.253,18.476 v1(65.237,18.491)
NetIC4_9: IC4.9 LCD.6 | length 109.4
  Top Layer w0.254: LCD.6 35.532,7.112 37.817,7.112 39.751,9.046 39.751,36.576 40.488,37.313 45.522,37.313 47.946,34.889 47.946,33.715 48.422,33.238 52.619,33.238 53.254,33.873 53.254,34.889 55.678,37.313 61.747,37.313 67.539,31.521 67.539,24.74 64.211,21.412 64.211,12.751 63.221,11.76 56.341,11.76 55.361,10.781 55.361,9.939 55.957,9.344 57.98,9.344 58.852,10.216 IC4.9
NetIC4_10: IC4.10 LCD.5 | length 32.4
  Top Layer w0.254: v1(57.404,5.182) 58.039,5.817 58.039,8.128 58.857,8.946 IC4.10
  Bottom Layer w0.254: LCD.5 36.26,0.9 39.272,0.9 40.5,2.128 40.5,3.385 41.47,4.355 49.63,4.355 50.456,5.182 v1(57.404,5.182)
NetIC4_11: IC4.11 LCD.4 | length 33.7
  Top Layer w0.254: v1(56.377,10.36) 56.894,10.876 61.415,10.876 61.638,10.653 61.638,7.676 IC4.11
  Bottom Layer w0.254: LCD.4 36.6,4.53 42.43,10.36 v1(56.377,10.36)
NetIC4_12: IC4.12 LCD.3 | length 25.8
  Top Layer w0.254: v1(55.58,6.599) 56.388,5.791 56.388,4.674 56.896,4.166 57.912,4.166 58.572,4.826 58.572,6.096 58.882,6.406 IC4.12
  Bottom Layer w0.254: LCD.3 41.824,5.784 48.029,5.784 48.916,6.671 55.508,6.671 v1(55.58,6.599)
NetIC5_1: IC5.1 R20.2 | length 6.8
  Bottom Layer w0.254: R20.2 29.997,46.85 33.401,43.446 33.54,43.446 IC5.1
NetIC5_2: IC5.2 R19.1 | length 3.2
  Bottom Layer w0.254: IC5.2 34.29,41.775 35.465,40.6 R19.1
NetIC5_3: IC5.3 R23.2 | length 16.8
  Bottom Layer w0.254: R23.2 22.225,46.85 24.549,44.526 30.297,44.526 32.599,42.225 32.599,41.228 33.107,40.72 33.107,40.668 33.27,40.505 IC5.3
NetIC5_5: IC5.5 R22.1 | length 18.7
  Bottom Layer w0.254: R22.1 24.75,38.861 25.385,39.496 25.385,42.863 26.286,43.764 30.341,43.764 31.852,42.253 31.852,41.257 32.599,40.51 32.599,38.638 33.107,38.13 33.107,38.128 33.27,37.965 IC5.5
NetIC5_12: IC5.12 R16.1 | length 28.1
  Bottom Layer w0.254: IC5.12 28.53,37.965 28.88,37.615 28.88,37.49 30.397,35.973 30.397,33.541 32.516,31.422 35.802,31.422 35.876,31.496 43.855,31.496 44.45,32.091 44.45,32.933 43.855,33.528 41.458,33.528 40.95,34.036 R16.1
NetIC5_13: IC5.13 R17.2 | length 62.5
  Bottom Layer w0.254: IC5.13 27.99,39.235 27.102,38.347 27.102,34.366 26.645,33.909 9.144,33.909 7.798,35.255 7.798,38.531 8.864,38.531 15.57,45.237 16.256,45.237 19.177,48.158 33.744,48.158 35.052,46.85 R17.2
NetIC6_1: IC6.1 R14.2 | length 17.3
  Top Layer w0.254: IC6.1 v1(62.593,21.125)
  Bottom Layer w0.254: R14.2 57.7,12.45 58.204,12.954 62.662,12.954 64.211,14.503 64.211,19.507 v1(62.593,21.125)
NetIC6_5: IC6.5 R30.2 | length 2.9
  Top Layer w0.254: R30.2 57.537,18.514 60.44,18.514 IC6.5
NetIC6_15: IC6.15 USB.3 | length 16.1
  Top Layer w0.254: IC6.15 69.875,12.675 78.01,20.81 USB.3
NetIC6_16: IC6.16 USB.2 | length 14.2
  Top Layer w0.254: IC6.16 69.164,13.325 76.01,20.171 USB.2
NetJ6_2: LCD.2 R12.2 | length 29
  Bottom Layer w0.254: LCD.2 44.063,0.717 64.151,0.717 64.958,1.524 68.35,1.524 R12.2
NetJ6_14: BRT.3 LCD.14 | length 45
  Top Layer w0.254: LCD.14 12.275,3.1 13.311,4.136 17.166,4.136 17.784,3.518 17.784,2.671 18.747,1.708 36.673,1.708 37.745,2.78 37.745,3.898 39.515,5.668 40.427,5.668 43.455,8.696 46.335,8.696 49.36,5.671 BRT.3
NetJ10_1: R25.2 SW4.1 | length 49.7
  Bottom Layer w0.254: SW4.1 1.2,12.26 1.2,43.95 1.2,44.912 1.896,45.607 5.195,45.607 5.852,46.265 5.852,47.552 6.51,48.209 9.195,48.209 10.554,46.85 R25.2
NetJ10_3: R26.1 SW4.3 | length 41.5
  Top Layer w0.254: SW4.3 2,16.54 2,31.896 4.977,34.873 4.977,36.981 7.191,39.195 v1(17.961,39.195)
  Bottom Layer w0.254: R26.1 16.597,37.023 16.597,38.18 17.612,39.195 v1(17.961,39.195)
NetJ11_1: R27.2 SW5.1 | length 23
  Bottom Layer w0.254: R27.2 2.819,22.631 SW5.1
NetJ11_3: R29.1 SW5.3 | length 16.7
  Bottom Layer w0.254: SW5.3 6.833,29.363 6.833,38.672 7.522,39.362 8.45,39.362 R29.1
NetR1_2: POT1.3 R1.2 | length 3.4
  Bottom Layer w0.254: POT1.3 48.25,47.19 R1.2
NetR2_2: POT2.3 R2.2 | length 3.4
  Bottom Layer w0.254: POT2.3 58.85,47.17 R2.2
NetR3_2: POT3.3 R3.2 | length 3.4
  Bottom Layer w0.254: POT3.3 69.55,47.174 R3.2
NetR9_1: R9.1 R10.2 RESET.1 | length 19.9
  Top Layer w0.254: v1(69.317,38.405) 71.272,36.449 71.272,29.27 RESET.1
  Bottom Layer w0.254: R10.2 R9.1 68.656,37.95 69.111,38.405 v1(69.317,38.405)
NetR15_1: B1.1 R15.1 R16.2 | length 36
  Top Layer w0.254: B1.1 36.66,41.74 37.744,42.824 37.744,48.895 39.446,50.597 42.672,50.597 44.628,48.641 v1(44.628,40.081)
  Bottom Layer w0.254: R16.2 R15.1@43.65,40.081 ; R15.1 R15.1@43.65,40.081 ; v1(44.628,40.081) R15.1@43.65,40.081
NetR18_1: B2.1 R18.1 R19.2 | length 37.8
  Top Layer w0.254: v1(26.848,45.771) 29.193,45.771 31.09,43.874 31.09,40.032 28.998,37.94 28.998,35.713 B2.1
  Bottom Layer w0.254: v1(26.848,45.771) 26.848,47.244 27.102,47.498 30.48,47.498 32.156,45.822 36.068,45.822 38.95,42.94 R19.2 38.95,39.987 36.25,37.287 R18.1
NetR21_1: B3.1 R21.1 R22.2 | length 8.9
  Top Layer w0.254: B3.1 19.76,36.576 20.321,37.137 v1(20.321,37.889)
  Bottom Layer w0.254: v1(20.321,37.889) 21.21,37 R22.2 R21.1
NetR24_1: B4.1 R24.1 R26.2 | length 9.3
  Top Layer w0.254: B4.1 11.209,37.955 v1(11.43,38.176)
  Bottom Layer w0.254: v1(11.43,38.176) 11.583,38.023 13.143,38.023 ; R26.2 13.774,37.751 13.651,37.874 13.292,37.874 13.143,38.023 ; R24.1 13.143,40.169 13.143,38.023
NetR28_1: B5.1 R28.1 R29.2 | length 10.1
  Top Layer w0.254: B5.1 2.955,37.88 v1(4.343,39.268)
  Bottom Layer w0.254: v1(4.343,39.268) 5.09,39.268 5.75,38.608 ; R28.1 5.75,38.608 ; R29.2 5.75,38.608
pads on no net: B1.3 B1.4 B2.3 B2.4 B3.3 B3.4 B4.3 B4.4 B5.3 B5.4 IC4.7 IC4.13 IC6.2 IC6.3 IC6.6 IC6.8 IC6.9 IC6.10 IC6.11 IC6.12 IC6.13 IC6.14 IC6.17 IC6.22 IC6.23 IC6.24 IC6.27 IC6.28 RESET.3 RESET.4 TEMP.3 USB.5 USB.6
copper on no net: | length 6.4
  Top Layer w0.254: 51.87,26.79 54.35,29.27 v1(57.24,29.27)

## Polygon pours and split planes (outlines as drawn)
GND on Bottom Layer "Top Layer-No Net" (solid, pour order 5): 0,0 85.7,0 85.7,54 0,54

## Keep-outs
Keep-Out Layer:
  the board outline again, w0.254

## Silkscreen, mask and mechanical layers (free items; w line width, h text height)
Top Overlay:
  lines w0.254: 2.146,9.4 2.146,11.5 ; 2.146,12.4 2.146,14.6 ; 2.146,21.4 2.146,23.5 ; 2.146,24.4 2.146,26.6 ; 61,23.9 63.3,23.9 ; 64.2,23.9 66.7,23.9
  text "5" at 80.333,47.532 h1.52
  text "3.3" at 80.328,45.03 h1.52
  text "GND" at 80.074,42.175 h1.52
  text "14" at 7.254,31.446 h1.52 r270
  text "13" at 9.654,31.446 h1.52 r270
  text "12" at 12.154,31.446 h1.52 r270
  text "10" at 17.354,31.446 h1.52 r270
  text "11" at 14.754,30.938 h1.52 r270
  text "9" at 19.854,30.176 h1.52 r270
  text "8" at 22.354,30.176 h1.52 r270
  text "7" at 24.954,30.176 h1.52 r270
  text "6" at 27.454,30.176 h1.52 r270
  text "5" at 30.054,30.176 h1.52 r270
  text "4" at 32.554,30.176 h1.52 r270
  text "3" at 35.054,30.176 h1.52 r270
  text "2" at 37.654,30.176 h1.52 r270
  text "1" at 40.254,29.669 h1.52 r270
  text "I" at 1,24.854 h1.52
  text "USB" at 59.954,22.454 h1
  text "JACK" at 64,22.4 h1
  text "O" at 0.7,21.854 h1.52
  text "I" at 1,12.854 h1.52
  text "O" at 0.7,9.854 h1.52
  text "15" at 7.054,9.046 h1.52 r270
  text "16" at 9.654,9.046 h1.52 r270
  text "17" at 12.154,9.046 h1.52 r270
  text "18" at 14.754,9.046 h1.52 r270
  text "19" at 17.254,9.046 h1.52 r270
  text "20" at 19.854,9.046 h1.52 r270
  text "21" at 22.354,9.046 h1.52 r270
  text "22" at 24.954,9.046 h1.52 r270
  text "23" at 27.454,9.046 h1.52 r270
  text "24" at 29.954,9.046 h1.52 r270
  text "25" at 32.454,9.046 h1.52 r270
  text "26" at 35.054,9.046 h1.52 r270
  text "27" at 37.654,9.046 h1.52 r270
  text "28" at 40.154,9.046 h1.52 r270
Bottom Overlay:
  text "Thibaut Maringer, Landry Taymans  / & Nathan Vico - ECAM" at 45.49,5.212 h1.25

## Text inside footprints (layer, text, board x,y; h text height)
C2: Bottom Overlay "+" at 77.975,29.425 h1 r180
C4: Bottom Overlay "+" at 78.275,2.625 h1 r180